# Altium PCB 底板20160428.PcbDoc (part 3 of 5)
Units mm, origin at the board's own origin, x right, y up, seen from the top; angles counter-clockwise.
Board outline 123.72 x 102.71 mm, 2 copper layers (Top Layer, Bottom Layer); 224 components, 227 nets, 768 pads, 282 vias.
Unrouted connection lines stored in the file: 2.
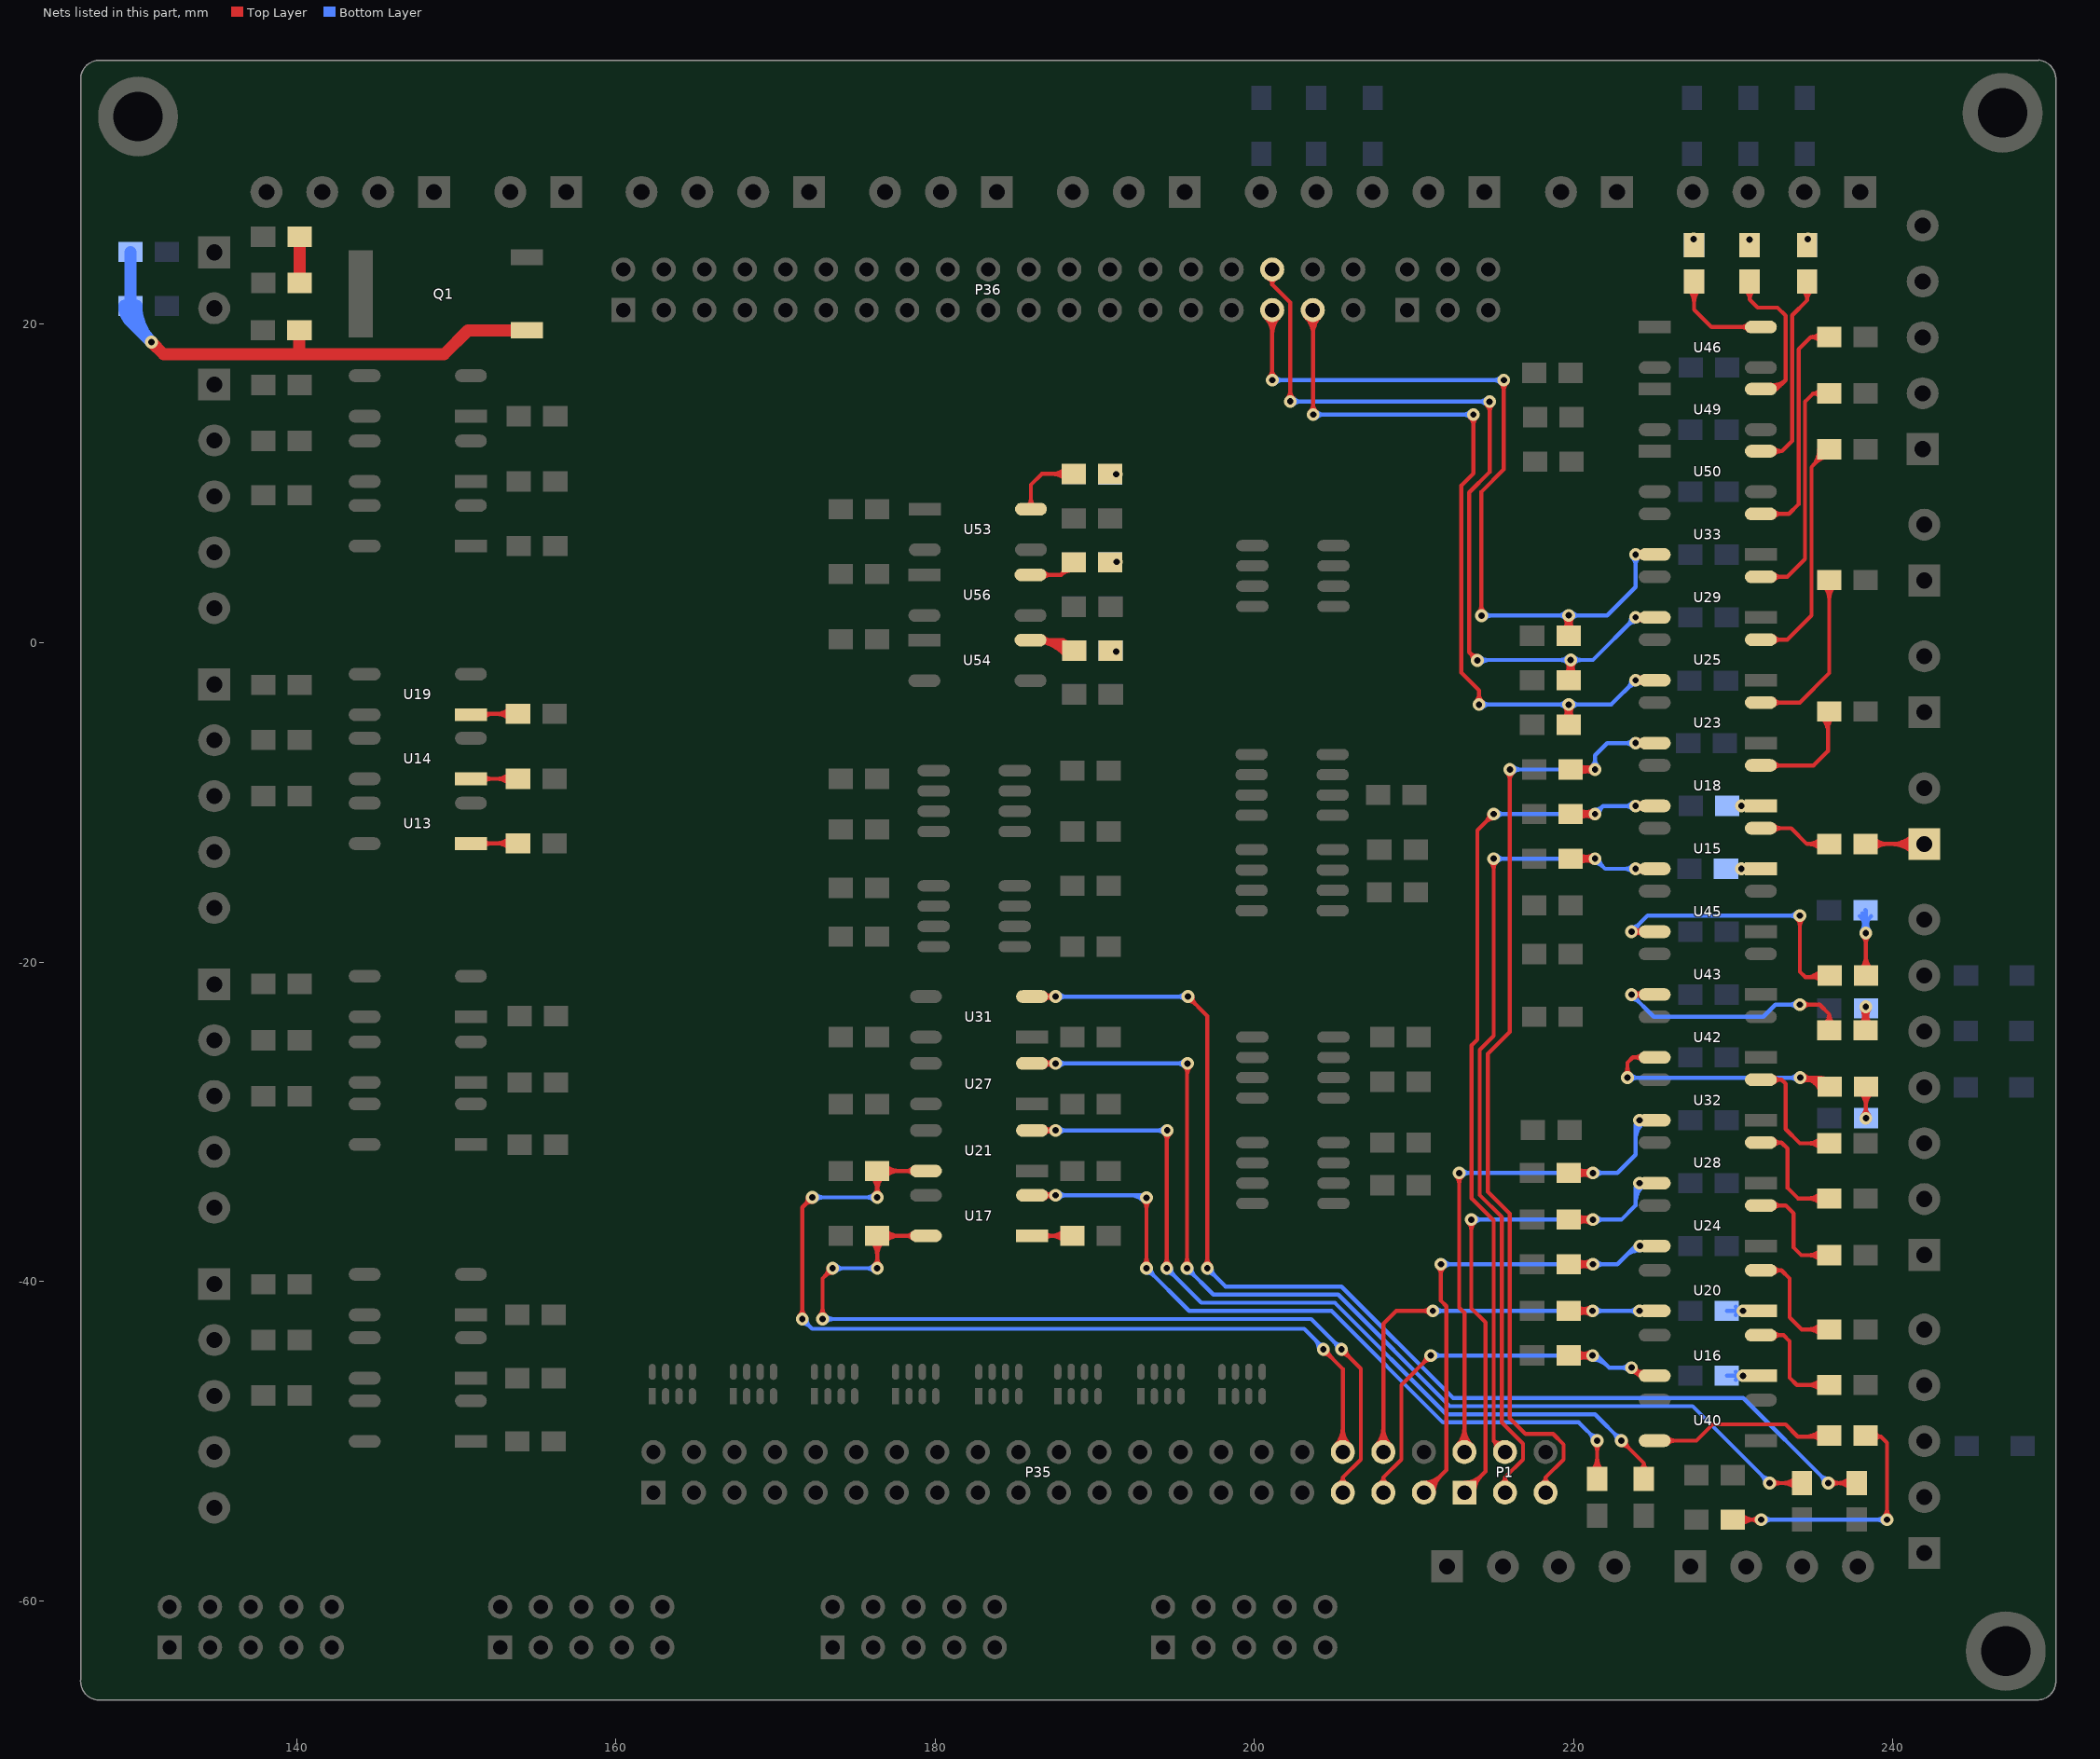
[diagram p3: the nets of this part, all layers, seen from the top]

## Via types
v1: diameter 0.8, hole 0.4, Top Layer to Bottom Layer, 282 vias

## Nets (pads, with @x,y where several pads share a name; then routed paths per layer and width w, separated by ;. In a path a pad name is that pad's centre, name@x,y a point inside that pad or via, vN(x,y) a via of type N, cw(c..) or ccw(c..) an arc to the next point about the centre after c; other vN are vias at no path point) (continued)
INPUT_27_B: P35.35 R51.1 U17.6 | length 68.7
  Top Layer w0.254: v1@172.756,-42.149 ccw(c172.29,-41.683) 172.949,-41.683 ccw(c173.608,-41.683) v1@173.142,-42.149 ; v1(172.949,-42.342) 172.949,-39.802 v1(173.584,-39.167) ; v1@173.311,-39.167 cw(c172.652,-39.167) 173.118,-39.633 cw(c173.584,-40.099) v1@173.584,-39.44 ; R51.1@176.018,-37.494 cw(c175.151,-38.361) 176.378,-38.361 cw(c177.604,-38.361) R51.1@176.737,-37.494 ; v1@176.185,-38.974 ccw(c175.719,-38.508) 176.378,-38.508 ccw(c177.037,-38.508) v1@176.571,-38.974 ; v1(176.378,-39.167) R51.1@176.378,-37.135 U17.6@179.426,-37.134 U17.6@179.426,-37.134 ; R51.1@176.864,-37.494 cw(c177.731,-38.361) 177.731,-37.135 cw(c177.731,-35.908) R51.1@176.864,-36.776 ; 178.164,-37.135 ccw(c178.164,-36.472) U17.6@178.633,-36.941 ; 178.169,-37.135 cw(c178.169,-37.79) U17.6@178.633,-37.327 ; P35.35@205.294,-52.639 ccw(c205.138,-52.273) 205.537,-52.273 ; v1@205.461,-44.52 cw(c205.461,-45.179) 205.927,-44.713 cw(c206.393,-44.247) v1@205.734,-44.247 ; v1(205.461,-44.247) 206.668,-45.454 206.668,-51.141 205.537,-52.272 ; P35.35@205.537,-53.213 205.537,-52.272 ; P35.35@205.78,-52.639 cw(c205.935,-52.273) 205.537,-52.273
  Bottom Layer w0.254: v1(172.949,-42.342) 203.556,-42.342 v1(205.461,-44.247) ; v1@173.142,-42.535 cw(c173.608,-43.001) 173.608,-42.342 cw(c173.608,-41.683) v1@173.142,-42.149 ; v1(173.584,-39.167) v1(176.378,-39.167) ; v1@173.777,-39.36 cw(c174.243,-39.826) 174.243,-39.167 cw(c174.243,-38.508) v1@173.777,-38.974 ; v1@176.185,-39.36 ccw(c175.719,-39.826) 175.719,-39.167 ccw(c175.719,-38.508) v1@176.185,-38.974 ; v1@205.188,-44.247 ccw(c204.529,-44.247) 204.995,-43.781 ccw(c205.461,-43.315) v1@205.461,-43.974
INPUT_28_B: P35.36 R59.1 U21.6 | length 74
  Top Layer w0.254: v1@171.486,-42.149 ccw(c171.02,-41.683) 171.679,-41.683 ccw(c172.338,-41.683) v1@171.872,-42.149 ; v1(171.679,-42.342) 171.679,-35.357 v1(172.314,-34.722) ; v1@172.041,-34.722 cw(c171.382,-34.722) 171.848,-35.188 cw(c172.314,-35.654) v1@172.314,-34.995 ; R59.1@176.018,-33.43 cw(c175.151,-34.297) 176.378,-34.297 cw(c177.604,-34.297) R59.1@176.737,-33.43 ; v1@176.185,-34.529 ccw(c175.719,-34.063) 176.378,-34.063 ccw(c177.037,-34.063) v1@176.571,-34.529 ; v1(176.378,-34.722) R59.1@176.378,-33.071 U21.6@179.426,-33.07 U21.6@179.426,-33.07 ; R59.1@176.864,-33.43 cw(c177.731,-34.297) 177.731,-33.071 cw(c177.731,-31.844) R59.1@176.864,-32.712 ; 178.164,-33.071 ccw(c178.164,-32.408) U21.6@178.633,-32.877 ; 178.169,-33.071 cw(c178.169,-33.726) U21.6@178.633,-33.263 ; v1@204.318,-44.52 cw(c204.318,-45.179) 204.784,-44.713 cw(c205.25,-44.247) v1@204.591,-44.247 ; v1(204.318,-44.247) 205.537,-45.466 P35.36@205.537,-50.673 ; P35.36@205.096,-50.232 ccw(c204.033,-49.169) 205.537,-49.169 ccw(c207.041,-49.169) P35.36@205.977,-50.232 ; P35.36@205.276,-50.412 ccw(c204.646,-49.782) 205.537,-49.782 ccw(c206.428,-49.782) P35.36@205.798,-50.412
  Bottom Layer w0.254: v1@171.679,-42.615 cw(c171.679,-43.274) 172.145,-42.808 cw(c172.611,-42.342) v1@171.952,-42.342 ; v1(171.679,-42.342) 172.295,-42.958 203.117,-42.958 204.318,-44.158 v1(204.318,-44.247) ; v1(172.314,-34.722) v1(176.378,-34.722) ; v1@172.507,-34.915 cw(c172.973,-35.381) 172.973,-34.722 cw(c172.973,-34.063) v1@172.507,-34.529 ; v1@176.185,-34.915 ccw(c175.719,-35.381) 175.719,-34.722 ccw(c175.719,-34.063) v1@176.185,-34.529 ; 203.789,-43.63 cw(c203.172,-44.247) v1@204.045,-44.247 ; 204.003,-43.843 ccw(c204.318,-43.528) v1@204.318,-43.974
INPUT_29_B: P35.37 R50.1 U16.6 | length 41.6
  Top Layer w0.254: P35.37@207.834,-52.639 ccw(c207.678,-52.273) 208.077,-52.273 ; P35.37@208.077,-53.213 208.077,-52.272 ; P35.37@208.32,-52.639 cw(c208.475,-52.273) 208.077,-52.273 ; v1@210.776,-44.628 cw(c210.117,-44.628) 210.583,-45.094 cw(c211.049,-45.56) v1@211.049,-44.901 ; v1(211.049,-44.628) 209.208,-46.469 209.208,-51.141 208.077,-52.272 ; R50.1@219.685,-44.628 v1(221.183,-44.628) ; R50.1@220.171,-44.987 cw(c221.038,-45.854) 221.038,-44.628 cw(c221.038,-43.401) R50.1@220.171,-44.269 ; 220.488,-44.775 cw(c220.667,-45.445) v1@221.038,-44.859 ; 220.488,-44.48 ccw(c220.667,-43.81) v1@221.038,-44.397 ; 220.624,-44.739 ccw(c220.487,-44.226) v1@220.947,-44.491 ; 220.624,-44.517 cw(c220.487,-45.03) v1@220.947,-44.764 ; v1@220.99,-44.821 ccw(c220.524,-45.287) 220.524,-44.628 ccw(c220.524,-43.969) v1@220.99,-44.435 ; v1@223.622,-45.663 cw(c223.622,-46.322) 224.088,-45.856 cw(c224.554,-45.39) v1@223.895,-45.39 ; v1@223.766,-45.621 cw(c223.894,-45.827) 224.016,-45.617 cw(c224.137,-45.407) v1@223.894,-45.399 ; v1@223.887,-45.455 ccw(c224.154,-45.52) 224.016,-45.759 ; v1@223.892,-45.349 ccw(c224.658,-45.234) U16.6@224.271,-45.906 ; 223.955,-45.724 ccw(c224.357,-45.322) U16.6@224.47,-45.878 ; U16.6@224.419,-45.629 cw(c224.243,-44.768) v1(223.622,-45.39) 224.129,-45.897 U16.6@225.146,-45.897
  Bottom Layer w0.254: v1(211.049,-44.628) 221.463,-44.628 222.225,-45.39 v1(223.622,-45.39) ; v1@211.242,-44.821 cw(c211.708,-45.287) 211.708,-44.628 cw(c211.708,-43.969) v1@211.242,-44.435 ; v1@220.99,-44.821 ccw(c220.524,-45.287) 220.524,-44.628 ccw(c220.524,-43.969) v1@220.99,-44.435 ; v1@221.183,-44.901 cw(c221.183,-46.234) 222.126,-45.291 ; v1@221.183,-44.647 cw(c221.183,-45.367) 221.693,-44.858 ; v1@223.429,-45.583 ccw(c222.963,-46.049) 222.963,-45.39 ccw(c222.963,-44.731) v1@223.429,-45.197
INPUT_30_B: P35.38 R58.1 U20.6 | length 42.7
  Top Layer w0.254: P35.38@207.636,-50.232 ccw(c206.573,-49.169) 208.077,-49.169 ccw(c209.581,-49.169) P35.38@208.517,-50.232 ; P35.38@207.816,-50.412 ccw(c207.186,-49.782) 208.077,-49.782 ccw(c208.968,-49.782) P35.38@208.338,-50.412 ; P35.38@208.077,-50.673 208.077,-42.647 208.89,-41.834 v1(211.176,-41.834) ; v1@210.983,-42.027 ccw(c210.517,-42.493) 210.517,-41.834 ccw(c210.517,-41.175) v1@210.983,-41.641 ; R58.1@219.685,-41.834 R58.1@219.685,-41.834 v1(221.183,-41.834) ; R58.1@220.171,-42.193 cw(c221.038,-43.06) 221.038,-41.834 cw(c221.038,-40.607) R58.1@220.171,-41.475 ; 220.488,-41.981 cw(c220.667,-42.651) v1@221.038,-42.065 ; 220.488,-41.686 ccw(c220.667,-41.016) v1@221.038,-41.603 ; 220.624,-41.945 ccw(c220.487,-41.432) v1@220.947,-41.697 ; 220.624,-41.723 cw(c220.487,-42.236) v1@220.947,-41.97 ; v1@220.99,-42.027 ccw(c220.524,-42.493) 220.524,-41.834 ccw(c220.524,-41.175) v1@220.99,-41.641 ; U20.6@224.269,-42.012 ccw(c223.876,-42.355) v1@223.876,-41.834 ; U20.6@224.268,-41.654 cw(c223.876,-41.316) v1@223.876,-41.834 ; U20.6@224.323,-42.027 cw(c224.791,-42.495) U20.6@224.791,-41.833 ; U20.6@224.323,-41.641 ccw(c224.786,-41.177) U20.6@224.786,-41.833 ; U20.6@225.146,-41.833 v1(224.13,-41.834) v1(224.13,-41.834) v1@223.876,-41.834
  Bottom Layer w0.254: v1(211.176,-41.834) 223.876,-41.834 v1@223.877,-41.833 ; v1@211.369,-42.027 cw(c211.835,-42.493) 211.835,-41.834 cw(c211.835,-41.175) v1@211.369,-41.641 ; v1@220.99,-42.027 ccw(c220.524,-42.493) 220.524,-41.834 ccw(c220.524,-41.175) v1@220.99,-41.641 ; v1@221.376,-42.027 cw(c221.842,-42.493) 221.842,-41.834 cw(c221.842,-41.175) v1@221.376,-41.641 ; v1@223.937,-42.027 ccw(c223.471,-42.493) 223.471,-41.834 ccw(c223.471,-41.175) v1@223.937,-41.641
INPUT_31_B: P35.39 R66.1 U24.6 | length 46.9
  Top Layer w0.254: P35.39@210.617,-53.213 212.026,-51.804 212.026,-41.541 211.684,-41.199 v1(211.684,-38.913) ; P35.39@210.617,-52.844 ccw(c210.617,-51.953) 211.247,-52.583 ccw(c211.877,-53.213) P35.39@210.986,-53.213 ; P35.39@210.617,-52.59 ccw(c210.617,-51.086) 211.68,-52.149 ccw(c212.744,-53.213) P35.39@211.24,-53.213 ; v1@211.491,-39.106 cw(c211.025,-39.572) 211.684,-39.572 cw(c212.343,-39.572) v1@211.877,-39.106 ; R66.1@219.685,-38.913 v1(221.209,-38.913) ; R66.1@220.171,-39.272 cw(c221.038,-40.139) 221.038,-38.913 cw(c221.038,-37.686) R66.1@220.171,-38.554 ; 220.499,-39.057 cw(c220.682,-39.743) v1@221.062,-39.143 ; 220.499,-38.768 ccw(c220.682,-38.083) v1@221.062,-38.682 ; 220.664,-39.013 ccw(c220.532,-38.522) v1@220.972,-38.776 ; 220.664,-38.812 cw(c220.532,-39.303) v1@220.972,-39.049 ; v1@221.016,-39.106 ccw(c220.55,-39.572) 220.55,-38.913 ccw(c220.55,-38.254) v1@221.016,-38.72 ; v1@223.876,-37.77 v1@223.877,-37.769 ; U24.6@224.268,-37.947 ccw(c223.877,-38.286) v1@223.877,-37.769 ; U24.6@224.268,-37.59 cw(c223.877,-37.251) v1@223.877,-37.769 ; U24.6@224.348,-37.963 cw(c224.817,-38.431) U24.6@224.817,-37.769 ; U24.6@224.348,-37.577 ccw(c224.812,-37.113) U24.6@224.812,-37.769 ; U24.6@225.146,-37.769 v1@223.877,-37.769
  Bottom Layer w0.254: v1(211.684,-38.913) v1(221.209,-38.913) 222.733,-38.913 v1@223.876,-37.77 ; v1@211.877,-39.106 cw(c212.343,-39.572) 212.343,-38.913 cw(c212.343,-38.254) v1@211.877,-38.72 ; v1@221.016,-39.106 ccw(c220.55,-39.572) 220.55,-38.913 ccw(c220.55,-38.254) v1@221.016,-38.72 ; v1@221.402,-39.106 cw(c221.868,-39.572) 221.868,-38.913 cw(c221.868,-38.254) v1@221.402,-38.72 ; 223.212,-38.433 cw(c224.155,-39.376) v1@224.155,-38.043 ; 223.646,-38 cw(c224.155,-38.509) v1@224.155,-37.789
  other v1: 224.155,-37.77
INPUT_32_B: P1.1 R74.1 U28.6 | length 49.6
  Top Layer w0.254: P1.1@213.157,-53.213 214.478,-51.892 214.478,-42.556 213.589,-41.667 v1(213.589,-36.119) ; P1.1@213.157,-52.844 ccw(c213.157,-51.953) 213.787,-52.583 ccw(c214.417,-53.213) P1.1@213.526,-53.213 ; P1.1@213.157,-52.59 ccw(c213.157,-51.086) 214.22,-52.149 ccw(c215.284,-53.213) P1.1@213.78,-53.213 ; v1@213.396,-36.312 cw(c212.93,-36.778) 213.589,-36.778 cw(c214.248,-36.778) v1@213.782,-36.312 ; R74.1@219.685,-36.119 v1(221.209,-36.119) ; R74.1@220.171,-36.478 cw(c221.038,-37.345) 221.038,-36.119 cw(c221.038,-34.892) R74.1@220.171,-35.76 ; 220.499,-36.263 cw(c220.682,-36.949) v1@221.062,-36.349 ; 220.499,-35.974 ccw(c220.682,-35.289) v1@221.062,-35.888 ; 220.664,-36.219 ccw(c220.532,-35.728) v1@220.972,-35.982 ; 220.664,-36.018 cw(c220.532,-36.509) v1@220.972,-36.255 ; v1@221.016,-36.312 ccw(c220.55,-36.778) 220.55,-36.119 ccw(c220.55,-35.46) v1@221.016,-35.926 ; v1@223.876,-33.833 v1@223.877,-33.832 ; U28.6@224.268,-34.01 ccw(c223.877,-34.349) v1@223.877,-33.832 ; U28.6@224.268,-33.653 cw(c223.877,-33.314) v1@223.877,-33.832 ; U28.6@224.323,-34.026 cw(c224.791,-34.494) U28.6@224.791,-33.832 ; U28.6@224.323,-33.64 ccw(c224.786,-33.176) U28.6@224.786,-33.832 ; U28.6@225.146,-33.832 v1@223.877,-33.832
  Bottom Layer w0.254: v1(213.589,-36.119) v1(221.209,-36.119) 222.987,-36.119 223.877,-35.229 223.877,-34.086 v1(224.13,-33.833) ; v1@213.782,-36.312 cw(c214.248,-36.778) 214.248,-36.119 cw(c214.248,-35.46) v1@213.782,-35.926 ; v1@221.016,-36.312 ccw(c220.55,-36.778) 220.55,-36.119 ccw(c220.55,-35.46) v1@221.016,-35.926 ; v1@221.402,-36.312 cw(c221.868,-36.778) 221.868,-36.119 cw(c221.868,-35.46) v1@221.402,-35.926 ; 223.877,-35.103 cw(c225.399,-35.103) v1@224.323,-34.026 ; 223.877,-34.489 cw(c224.786,-34.489) v1@224.143,-33.846
INPUT_33_B: P1.2 R82.1 U32.6 | length 50.9
  Top Layer w0.254: v1@212.634,-33.391 cw(c212.168,-33.857) 212.827,-33.857 cw(c213.486,-33.857) v1@213.02,-33.391 ; P1.2@212.716,-50.232 ccw(c211.653,-49.169) 213.157,-49.169 ccw(c214.661,-49.169) P1.2@213.597,-50.232 ; v1(212.827,-33.198) 212.827,-41.623 213.157,-41.954 P1.2@213.157,-50.673 ; P1.2@212.896,-50.412 ccw(c212.266,-49.782) 213.157,-49.782 ccw(c214.048,-49.782) P1.2@213.418,-50.412 ; R82.1@219.685,-33.198 v1(221.209,-33.198) ; R82.1@220.171,-33.557 cw(c221.038,-34.424) 221.038,-33.198 cw(c221.038,-31.971) R82.1@220.171,-32.839 ; 220.499,-33.342 cw(c220.682,-34.028) v1@221.062,-33.428 ; 220.499,-33.053 ccw(c220.682,-32.368) v1@221.062,-32.967 ; 220.664,-33.298 ccw(c220.532,-32.807) v1@220.972,-33.061 ; 220.664,-33.097 cw(c220.532,-33.588) v1@220.972,-33.334 ; v1@221.016,-33.391 ccw(c220.55,-33.857) 220.55,-33.198 ccw(c220.55,-32.539) v1@221.016,-33.005 ; v1@223.876,-29.896 v1@223.877,-29.895 ; U32.6@224.268,-30.073 ccw(c223.877,-30.412) v1@223.877,-29.895 ; U32.6@224.268,-29.716 cw(c223.877,-29.377) v1@223.877,-29.895 ; U32.6@224.323,-30.088 cw(c224.789,-30.554) 224.789,-29.895 cw(c224.789,-29.236) U32.6@224.323,-29.702 ; U32.6@225.146,-29.895 v1@223.877,-29.895
  Bottom Layer w0.254: v1(212.827,-33.198) v1(221.209,-33.198) 222.733,-33.198 223.876,-32.055 223.876,-30.149 v1(224.13,-29.895) ; v1@213.02,-33.391 cw(c213.486,-33.857) 213.486,-33.198 cw(c213.486,-32.539) v1@213.02,-33.005 ; v1@221.016,-33.391 ccw(c220.55,-33.857) 220.55,-33.198 ccw(c220.55,-32.539) v1@221.016,-33.005 ; v1@221.402,-33.391 cw(c221.868,-33.857) 221.868,-33.198 cw(c221.868,-32.539) v1@221.402,-33.005 ; 223.876,-31.167 cw(c225.402,-31.167) v1@224.323,-30.088 ; 223.876,-30.554 cw(c224.789,-30.554) v1@224.143,-29.908
INPUT_34_B: P1.3 R49.1 U15.6 | length 66.6
  Top Layer w0.254: v1@214.793,-13.706 cw(c214.327,-14.172) 214.986,-14.172 cw(c215.645,-14.172) v1@215.179,-13.706 ; v1(214.986,-13.513) 214.986,-24.613 214.116,-25.483 214.116,-34.581 215.494,-35.959 215.494,-48.819 216.828,-50.153 216.828,-51.141 215.697,-52.272 ; P1.3@215.454,-52.639 ccw(c215.298,-52.273) 215.697,-52.273 ; P1.3@215.697,-53.213 215.697,-52.272 ; P1.3@215.94,-52.639 cw(c216.095,-52.273) 215.697,-52.273 ; R49.1@219.812,-13.513 v1(221.336,-13.513) ; R49.1@220.298,-13.872 cw(c221.165,-14.739) 221.165,-13.513 cw(c221.165,-12.286) R49.1@220.298,-13.154 ; 220.626,-13.657 cw(c220.809,-14.343) v1@221.189,-13.743 ; 220.626,-13.368 ccw(c220.809,-12.683) v1@221.189,-13.282 ; 220.791,-13.613 ccw(c220.659,-13.122) v1@221.099,-13.376 ; 220.791,-13.412 cw(c220.659,-13.903) v1@221.099,-13.649 ; v1@221.143,-13.706 ccw(c220.677,-14.172) 220.677,-13.513 ccw(c220.677,-12.854) v1@221.143,-13.32 ; v1(223.876,-14.148) v1(223.876,-14.148) ; v1@224.069,-14.341 cw(c224.537,-14.809) U15.6@224.537,-14.147 ; v1@224.069,-13.955 ccw(c224.532,-13.491) U15.6@224.532,-14.147 ; U15.6@224.268,-14.325 ccw(c223.877,-14.664) v1(223.876,-14.148) ; U15.6@224.268,-13.968 cw(c223.877,-13.629) v1(223.876,-14.148) ; U15.6@225.146,-14.147 v1(223.876,-14.148)
  Bottom Layer w0.254: v1(214.986,-13.513) v1(221.336,-13.513) 221.971,-14.148 v1(223.876,-14.148) ; v1@215.179,-13.706 cw(c215.645,-14.172) 215.645,-13.513 cw(c215.645,-12.854) v1@215.179,-13.32 ; v1@221.143,-13.706 ccw(c220.677,-14.172) 220.677,-13.513 ccw(c220.677,-12.854) v1@221.143,-13.32 ; v1@221.336,-13.786 cw(c221.336,-14.445) 221.802,-13.979 cw(c222.268,-13.513) v1@221.609,-13.513 ; v1@223.683,-14.341 ccw(c223.217,-14.807) 223.217,-14.148 ccw(c223.217,-13.489) v1@223.683,-13.955
INPUT_35_B: P1.4 R57.1 U18.6 | length 66.4
  Top Layer w0.254: v1@214.713,-10.719 cw(c214.054,-10.719) 214.52,-11.185 cw(c214.986,-11.651) v1@214.986,-10.992 ; v1(214.986,-10.719) 213.97,-11.735 213.97,-24.841 213.608,-25.203 213.608,-34.792 214.986,-36.17 214.986,-49.962 ; P1.4@215.106,-50.475 ccw(c214.632,-50.316) 214.986,-49.962 ; P1.4@215.499,-50.082 cw(c215.339,-49.608) 214.986,-49.962 ; P1.4@215.697,-50.673 214.986,-49.962 ; R57.1@219.812,-10.719 v1(221.336,-10.719) ; R57.1@220.298,-11.078 cw(c221.165,-11.945) 221.165,-10.719 cw(c221.165,-9.492) R57.1@220.298,-10.36 ; 220.626,-10.863 cw(c220.809,-11.549) v1@221.189,-10.949 ; 220.626,-10.574 ccw(c220.809,-9.889) v1@221.189,-10.488 ; 220.791,-10.819 ccw(c220.659,-10.328) v1@221.099,-10.582 ; 220.791,-10.618 cw(c220.659,-11.109) v1@221.099,-10.855 ; v1@221.143,-10.912 ccw(c220.677,-11.378) 220.677,-10.719 ccw(c220.677,-10.06) v1@221.143,-10.526 ; v1(223.876,-10.211) v1(223.876,-10.211) ; v1@224.069,-10.404 cw(c224.537,-10.872) U18.6@224.537,-10.21 ; v1@224.069,-10.018 ccw(c224.532,-9.554) U18.6@224.532,-10.21 ; U18.6@224.268,-10.388 ccw(c223.877,-10.727) v1(223.876,-10.211) ; U18.6@224.268,-10.031 cw(c223.877,-9.692) v1(223.876,-10.211) ; U18.6@225.146,-10.21 v1(223.876,-10.211)
  Bottom Layer w0.254: v1(214.986,-10.719) v1(221.336,-10.719) 221.844,-10.211 v1(223.876,-10.211) ; v1@215.179,-10.912 cw(c215.645,-11.378) 215.645,-10.719 cw(c215.645,-10.06) v1@215.179,-10.526 ; v1@221.143,-10.912 ccw(c220.677,-11.378) 220.677,-10.719 ccw(c220.677,-10.06) v1@221.143,-10.526 ; v1@221.336,-10.446 ccw(c221.336,-9.787) 221.802,-10.253 ccw(c222.268,-10.719) v1@221.609,-10.719 ; v1@223.683,-10.404 ccw(c223.217,-10.87) 223.217,-10.211 ccw(c223.217,-9.552) v1@223.683,-10.018
INPUT_36_B: P1.5 R65.1 U23.6 | length 74.1
  Top Layer w0.254: v1@215.809,-8.118 cw(c215.343,-8.584) 216.002,-8.584 cw(c216.661,-8.584) v1@216.195,-8.118 ; v1(216.002,-7.925) 216.002,-24.359 214.624,-25.737 214.624,-34.371 216.002,-35.749 216.002,-48.565 216.979,-49.542 218.705,-49.542 219.368,-50.205 219.368,-51.141 218.237,-52.272 ; P1.5@217.994,-52.639 ccw(c217.838,-52.273) 218.237,-52.273 ; P1.5@218.237,-53.213 218.237,-52.272 ; P1.5@218.48,-52.639 cw(c218.635,-52.273) 218.237,-52.273 ; R65.1@219.812,-7.925 v1(221.336,-7.925) ; R65.1@220.298,-8.284 cw(c221.165,-9.151) 221.165,-7.925 cw(c221.165,-6.698) R65.1@220.298,-7.566 ; 220.626,-8.069 cw(c220.809,-8.755) v1@221.189,-8.155 ; 220.626,-7.78 ccw(c220.809,-7.095) v1@221.189,-7.694 ; 220.791,-8.025 ccw(c220.659,-7.534) v1@221.099,-7.788 ; 220.791,-7.824 cw(c220.659,-8.315) v1@221.099,-8.061 ; v1@221.143,-8.118 ccw(c220.677,-8.584) 220.677,-7.925 ccw(c220.677,-7.266) v1@221.143,-7.732 ; v1@224.07,-6.466 cw(c224.536,-6.932) 224.536,-6.273 cw(c224.536,-5.614) v1@224.07,-6.08 ; U23.6@224.268,-6.451 ccw(c223.877,-6.79) v1(223.877,-6.273) ; U23.6@224.268,-6.094 cw(c223.877,-5.755) v1(223.877,-6.273) ; U23.6@225.146,-6.273 v1(223.877,-6.273)
  Bottom Layer w0.254: v1(216.002,-7.925) v1(221.336,-7.925) 221.336,-7.036 222.099,-6.273 v1(223.877,-6.273) ; v1@216.195,-8.118 cw(c216.661,-8.584) 216.661,-7.925 cw(c216.661,-7.266) v1@216.195,-7.732 ; v1@221.143,-8.118 ccw(c220.677,-8.584) 220.677,-7.925 ccw(c220.677,-7.266) 221.143,-7.732 ccw(c220.677,-7.266) 221.336,-7.266 ccw(c221.995,-7.266) v1@221.529,-7.732 ; v1@223.684,-6.466 ccw(c223.218,-6.932) 223.218,-6.273 ccw(c223.218,-5.614) v1@223.684,-6.08
INPUT_37_B: P36.35 R67.1 U25.6 | length 68.4
  Top Layer w0.254: P36.35@203.217,20.413 cw(c202.092,19.288) 203.683,19.288 ; P36.35@203.396,20.592 cw(c202.705,19.901) 203.683,19.901 ; v1@203.49,14.493 ccw(c203.024,14.959) 203.683,14.959 ccw(c204.342,14.959) v1@203.876,14.493 ; v1(203.683,14.3) P36.35@203.683,20.828 ; 203.683,19.411 cw(c205.1,19.411) P36.35@204.098,20.413 ; 203.683,20.024 cw(c204.487,20.024) P36.35@203.918,20.592 ; v1@213.523,14.107 cw(c213.057,13.641) 213.716,13.641 cw(c214.375,13.641) v1@213.909,14.107 ; v1(213.716,14.3) 213.716,10.617 212.954,9.855 212.954,-1.854 214.071,-2.972 v1(214.071,-3.861) ; v1@213.878,-3.668 ccw(c213.412,-3.202) 214.071,-3.202 ccw(c214.73,-3.202) v1@214.264,-3.668 ; R67.1@219.325,-4.772 ccw(c218.458,-3.904) 219.685,-3.904 ccw(c220.911,-3.904) R67.1@220.044,-4.772 ; v1@219.453,-4.005 cw(c218.918,-4.336) R67.1@219.525,-4.499 ; v1@219.492,-4.054 cw(c219.026,-4.52) 219.685,-4.52 cw(c220.344,-4.52) v1@219.878,-4.054 ; 219.532,-4.474 cw(c220.131,-4.635) v1@219.821,-4.097 ; v1@219.548,-4.097 cw(c219.238,-4.635) 219.837,-4.474 ; R67.1@219.685,-5.131 v1(219.685,-3.861) ; R67.1@219.844,-4.499 cw(c220.452,-4.336) v1@219.917,-4.005 ; v1(223.877,-2.336) v1(223.877,-2.336) ; v1@224.07,-2.529 cw(c224.536,-2.995) 224.536,-2.336 cw(c224.536,-1.677) v1@224.07,-2.143 ; U25.6@224.268,-2.514 ccw(c223.877,-2.853) v1(223.877,-2.336) ; U25.6@224.268,-2.157 cw(c223.877,-1.818) v1(223.877,-2.336) ; U25.6@225.146,-2.336 v1(223.877,-2.336)
  Bottom Layer w0.254: v1(203.683,14.3) v1(213.716,14.3) ; v1@203.876,14.107 cw(c204.342,13.641) 204.342,14.3 cw(c204.342,14.959) v1@203.876,14.493 ; v1@213.523,14.107 ccw(c213.057,13.641) 213.057,14.3 ccw(c213.057,14.959) v1@213.523,14.493 ; v1(214.071,-3.861) v1(219.685,-3.861) 222.352,-3.861 v1(223.877,-2.336) ; v1@214.264,-4.054 cw(c214.73,-4.52) 214.73,-3.861 cw(c214.73,-3.202) v1@214.264,-3.668 ; v1@219.492,-4.054 ccw(c219.026,-4.52) 219.026,-3.861 ccw(c219.026,-3.202) v1@219.492,-3.668 ; v1@219.878,-4.054 cw(c220.344,-4.52) 220.344,-3.861 cw(c220.344,-3.202) v1@219.878,-3.668 ; v1@223.604,-2.336 cw(c222.945,-2.336) 223.411,-2.802 cw(c223.877,-3.268) v1@223.877,-2.609
INPUT_38_B: P36.34 R75.1 U29.6 | length 68.9
  Top Layer w0.254: P36.34@200.874,22.82 cw(c200.719,22.453) 201.117,22.453 ; P36.34@201.117,23.393 201.117,22.453 ; P36.34@201.36,22.82 ccw(c201.516,22.453) 201.117,22.453 ; v1@202.055,15.318 ccw(c201.589,15.784) 202.248,15.784 ccw(c202.907,15.784) v1@202.441,15.318 ; v1(202.248,15.125) 202.248,21.322 201.117,22.453 ; v1@213.697,-1.092 ccw(c213.038,-1.092) 213.504,-0.626 ccw(c213.97,-0.16) v1@213.97,-0.819 ; v1(213.97,-1.092) 213.462,-0.584 213.462,9.431 214.732,10.701 v1(214.732,15.113) ; v1@214.539,14.92 cw(c214.073,14.454) 214.732,14.454 cw(c215.391,14.454) v1@214.925,14.92 ; R75.1@219.452,-1.978 ccw(c218.585,-1.11) 219.812,-1.11 ccw(c221.038,-1.11) R75.1@220.171,-1.978 ; v1@219.58,-1.211 cw(c219.045,-1.542) R75.1@219.652,-1.705 ; v1@219.619,-1.26 cw(c219.153,-1.726) 219.812,-1.726 cw(c220.471,-1.726) v1@220.005,-1.26 ; 219.659,-1.68 cw(c220.258,-1.841) v1@219.948,-1.303 ; v1@219.675,-1.303 cw(c219.365,-1.841) 219.964,-1.68 ; R75.1@219.685,-2.337 219.812,-2.21 v1(219.812,-1.067) ; R75.1@219.971,-1.705 cw(c220.579,-1.542) v1@220.044,-1.211 ; v1@224.07,1.408 cw(c224.536,0.942) 224.536,1.601 cw(c224.536,2.26) v1@224.07,1.794 ; U29.6@224.268,1.423 ccw(c223.877,1.084) v1(223.877,1.601) ; U29.6@224.268,1.78 cw(c223.877,2.119) v1(223.877,1.601) ; U29.6@225.146,1.601 v1(223.877,1.601)
  Bottom Layer w0.254: v1@202.248,15.113 v1(214.732,15.113) ; v1@202.441,14.932 cw(c202.878,14.495) 202.878,15.113 ; v1@202.441,15.318 ccw(c202.936,15.813) 202.936,15.113 ; v1@213.97,-1.067 v1(219.812,-1.067) 221.209,-1.067 v1(223.877,1.601) ; v1@214.163,-1.285 cw(c214.69,-1.813) 214.69,-1.067 ; v1@214.163,-0.899 ccw(c214.567,-0.494) 214.567,-1.067 ; v1@214.539,14.92 ccw(c214.073,14.454) 214.073,15.113 ccw(c214.073,15.772) v1@214.539,15.306 ; v1@219.619,-1.26 ccw(c219.153,-1.726) 219.153,-1.067 ccw(c219.153,-0.408) v1@219.619,-0.874 ; v1@220.005,-1.26 cw(c220.471,-1.726) 220.471,-1.067 cw(c220.471,-0.408) v1@220.005,-0.874 ; v1@223.604,1.601 cw(c222.945,1.601) 223.411,1.135 cw(c223.877,0.669) v1@223.877,1.328
INPUT_39_B: P36.33 R83.1 U33.6 | length 69.2
  Top Layer w0.254: P36.33@200.677,20.413 cw(c199.613,19.349) 201.117,19.349 cw(c202.621,19.349) P36.33@201.558,20.413 ; P36.33@200.856,20.592 cw(c200.226,19.963) 201.117,19.963 cw(c202.008,19.963) P36.33@201.378,20.592 ; v1@200.924,16.652 ccw(c200.458,17.118) 201.117,17.118 ccw(c201.776,17.118) v1@201.31,16.652 ; v1(201.117,16.459) P36.33@201.117,20.853 ; v1@214.031,1.895 ccw(c213.565,2.361) 214.224,2.361 ccw(c214.883,2.361) v1@214.417,1.895 ; v1(214.224,1.702) 214.224,9.474 215.621,10.871 v1(215.621,16.459) ; v1@215.428,16.266 cw(c214.962,15.8) 215.621,15.8 cw(c216.28,15.8) v1@215.814,16.266 ; R83.1@219.325,0.816 ccw(c218.458,1.684) 219.685,1.684 ccw(c220.911,1.684) R83.1@220.044,0.816 ; v1@219.453,1.583 cw(c218.918,1.252) R83.1@219.525,1.089 ; v1@219.492,1.534 cw(c219.026,1.068) 219.685,1.068 cw(c220.344,1.068) v1@219.878,1.534 ; 219.532,1.114 cw(c220.131,0.953) v1@219.821,1.491 ; v1@219.548,1.491 cw(c219.238,0.953) 219.837,1.114 ; R83.1@219.685,0.457 v1(219.685,1.727) ; R83.1@219.844,1.089 cw(c220.452,1.252) v1@219.917,1.583 ; v1(223.876,5.537) v1(223.876,5.537) ; v1@224.069,5.344 cw(c224.537,4.876) U33.6@224.537,5.538 ; v1@224.069,5.73 ccw(c224.532,6.194) U33.6@224.532,5.538 ; U33.6@224.268,5.36 ccw(c223.877,5.021) v1(223.876,5.537) ; U33.6@224.268,5.717 cw(c223.877,6.056) v1(223.876,5.537) ; U33.6@225.146,5.538 v1(223.876,5.537)
  Bottom Layer w0.254: v1(201.117,16.459) v1(215.621,16.459) ; v1@201.31,16.266 cw(c201.776,15.8) 201.776,16.459 cw(c201.776,17.118) v1@201.31,16.652 ; v1@214.224,1.727 v1(219.685,1.727) 222.098,1.727 223.876,3.505 v1(223.876,5.537) ; v1@214.417,1.509 cw(c214.944,0.981) 214.944,1.727 ; v1@214.417,1.895 ccw(c214.821,2.3) 214.821,1.727 ; v1@215.428,16.266 ccw(c214.962,15.8) 214.962,16.459 ccw(c214.962,17.118) v1@215.428,16.652 ; v1@219.492,1.534 ccw(c219.026,1.068) 219.026,1.727 ccw(c219.026,2.386) v1@219.492,1.92 ; v1@219.878,1.534 cw(c220.344,1.068) 220.344,1.727 cw(c220.344,2.386) v1@219.878,1.92 ; v1@223.683,5.344 cw(c223.217,4.878) 223.876,4.878 cw(c224.535,4.878) v1@224.069,5.344
JT_KR1: D14.2 P47.1 | length 11.3
  Top Layer w0.254: D14.2@238.302,-12.598 D14.2@238.295,-12.592 P47.1@241.954,-12.592 ; D14.2@238.781,-12.951 cw(c239.648,-13.818) 239.648,-12.592 cw(c239.648,-11.365) D14.2@238.781,-12.232 ; 239.836,-12.592 cw(c239.836,-14.722) P47.1@241.343,-13.216 ; 239.869,-12.592 ccw(c239.869,-10.507) P47.1@241.343,-11.981 ; 240.45,-12.592 cw(c240.45,-14.109) P47.1@241.523,-13.036 ; 240.482,-12.592 ccw(c240.482,-11.12) P47.1@241.523,-12.161
NetC1_2: C1.2 Q1.1 R1.1 R2.1 | length 35.6
  Top Layer w0.762: v1@130.937,18.821 131.674,18.085 149.25,18.085 150.749,19.583 Q1.1@154.432,19.583 ; 140.183,18.11 C1.2@140.183,19.583
  Bottom Layer w0.762: R2.1@129.21,21.107 ccw(c130.559,21.107) 129.605,20.153 ; R1.1@129.591,24.486 R2.1@129.591,21.107 129.591,20.168 v1(130.912,18.847) ; R2.1@129.972,21.107 ccw(c133.16,21.107) v1@130.906,18.853
NetD14_1: D14.1 U15.3 | length 7.7
  Top Layer w0.254: U15.3@231.724,-11.607 233.628,-11.607 234.613,-12.592 D14.1@236.009,-12.592 ; U15.3@232.517,-11.8 cw(c232.983,-12.266) 232.983,-11.607 cw(c232.983,-10.948) U15.3@232.517,-11.414 ; D14.1@235.523,-12.951 ccw(c234.656,-13.818) 234.656,-12.592 ccw(c234.656,-11.365) D14.1@235.523,-12.232
NetD15_1: D15.1 U16.3 | length 9.8
  Top Layer w0.254: U16.3@231.796,-43.357 233.146,-43.357 233.528,-43.739 233.528,-46.025 233.978,-46.475 D15.1@236.009,-46.475 ; U16.3@232.517,-43.55 cw(c232.983,-44.016) 232.983,-43.357 cw(c232.983,-42.698) U16.3@232.517,-43.164 ; D15.1@235.523,-46.834 ccw(c234.656,-47.702) 234.656,-46.475 ccw(c234.656,-45.249) D15.1@235.523,-46.116
NetD16_1: D16.1 U17.3 | length 59.5
  Top Layer w0.254: U17.3@186.076,-34.594 186.077,-34.595 v1(187.554,-34.595) ; U17.3@186.869,-34.787 cw(c187.332,-35.25) v1@187.332,-34.595 ; U17.3@186.869,-34.401 ccw(c187.337,-33.932) v1@187.337,-34.595 ; v1@187.304,-34.706 ccw(c187.019,-34.833) 187.1,-34.531 ccw(c187.153,-34.332) v1@187.325,-34.445 ; v1@187.305,-34.483 cw(c187.019,-34.355) 187.1,-34.657 cw(c187.153,-34.854) v1@187.324,-34.743 ; v1@187.361,-34.788 ccw(c186.895,-35.254) 186.895,-34.595 ccw(c186.895,-33.936) v1@187.361,-34.402 ; v1@193.05,-38.974 ccw(c192.584,-38.508) 193.243,-38.508 ccw(c193.902,-38.508) v1@193.436,-38.974 ; v1@193.05,-34.94 cw(c192.584,-35.406) 193.243,-35.406 cw(c193.902,-35.406) v1@193.436,-34.94 ; v1(193.243,-39.167) v1(193.243,-34.747) ; D16.1@221.11,-51.881 ccw(c220.243,-51.014) 221.469,-51.014 ccw(c222.696,-51.013) D16.1@221.829,-51.881 ; v1@221.276,-50.162 cw(c220.81,-50.628) 221.469,-50.628 cw(c222.128,-50.628) v1@221.662,-50.162 ; D16.1@221.469,-52.367 v1(221.469,-49.969)
  Bottom Layer w0.254: v1(187.554,-34.595) v1@193.396,-34.595 ; v1@187.747,-34.788 cw(c188.213,-35.254) 188.213,-34.595 cw(c188.213,-33.936) v1@187.747,-34.402 ; 192.216,-34.595 cw(c192.216,-35.774) v1@193.05,-34.94 ; 192.829,-34.595 cw(c192.829,-35.161) v1@193.23,-34.761 ; v1@193.243,-39.44 cw(c193.243,-40.099) 193.709,-39.633 cw(c194.175,-39.167) v1@193.516,-39.167 ; v1(193.243,-39.167) 195.91,-41.834 204.829,-41.834 211.814,-48.819 220.32,-48.819 v1(221.469,-49.969) ; v1@221.196,-49.969 ccw(c220.537,-49.969) 221.003,-49.503 ccw(c221.469,-49.036) v1@221.469,-49.696
NetD18_1: D18.1 U18.3 | length 10.5
  Top Layer w0.254: U18.3@231.796,-7.67 235.027,-7.67 235.933,-6.764 D18.1@235.933,-4.362 ; U18.3@232.517,-7.863 cw(c232.983,-8.329) 232.983,-7.67 cw(c232.983,-7.011) U18.3@232.517,-7.477 ; D18.1@235.523,-4.645 cw(c234.533,-5.635) 235.933,-5.635 ; D18.1@235.702,-4.465 cw(c235.146,-5.022) 235.933,-5.022 ; 235.933,-5.39 cw(c236.986,-5.39) D18.1@236.241,-4.645
NetD19_1: D19.1 U20.3 | length 10.1
  Top Layer w0.254: U20.3@231.796,-39.293 233.019,-39.293 233.528,-39.802 233.528,-42.24 234.283,-42.995 D19.1@236.009,-42.995 ; U20.3@232.517,-39.486 cw(c232.983,-39.952) 232.983,-39.293 cw(c232.983,-38.634) U20.3@232.517,-39.1 ; D19.1@235.523,-43.355 ccw(c234.656,-44.222) 234.656,-42.995 ccw(c234.656,-41.769) D19.1@235.523,-42.636
NetD20_1: D20.1 U21.3 | length 64.4
  Top Layer w0.254: U21.3@186.077,-30.531 v1(187.554,-30.531) ; U21.3@186.869,-30.723 cw(c187.332,-31.186) v1@187.332,-30.531 ; U21.3@186.869,-30.337 ccw(c187.337,-29.868) v1@187.337,-30.531 ; v1@187.304,-30.642 ccw(c187.019,-30.769) 187.1,-30.467 ccw(c187.153,-30.268) v1@187.325,-30.381 ; v1@187.305,-30.419 cw(c187.019,-30.291) 187.1,-30.593 cw(c187.153,-30.79) v1@187.324,-30.679 ; v1@187.361,-30.724 ccw(c186.895,-31.19) 186.895,-30.531 ccw(c186.895,-29.872) v1@187.361,-30.338 ; v1@194.32,-38.974 ccw(c193.854,-38.508) 194.513,-38.508 ccw(c195.172,-38.508) v1@194.706,-38.974 ; v1@194.346,-30.724 cw(c193.941,-31.129) 194.513,-31.129 ; v1(194.513,-39.167) v1@194.513,-30.556 ; 194.513,-31.251 cw(c195.259,-31.251) v1@194.732,-30.724 ; v1@222.987,-50.235 cw(c222.987,-50.894) 223.453,-50.428 cw(c223.919,-49.962) v1@223.26,-49.962 ; v1(222.987,-49.962) 224.39,-51.366 ; D20.1@224.139,-51.799 ccw(c223.892,-51.366) 224.39,-51.366 ; D20.1@224.39,-52.367 224.39,-51.366 ; D20.1@224.642,-51.799 cw(c224.889,-51.366) 224.39,-51.366
  Bottom Layer w0.254: v1(187.554,-30.531) v1(194.539,-30.531) ; v1@187.747,-30.724 cw(c188.213,-31.19) 188.213,-30.531 cw(c188.213,-29.872) v1@187.747,-30.338 ; v1@194.346,-30.724 ccw(c193.88,-31.19) 193.88,-30.531 ccw(c193.88,-29.872) v1@194.346,-30.338 ; v1@194.513,-39.44 cw(c194.513,-40.099) 194.979,-39.633 cw(c195.445,-39.167) v1@194.786,-39.167 ; v1(194.513,-39.167) 196.672,-41.326 205.04,-41.326 212.025,-48.311 221.336,-48.311 v1(222.987,-49.962) ; v1@222.714,-49.962 ccw(c222.055,-49.962) 222.521,-49.496 ccw(c222.987,-49.03) v1@222.987,-49.689
NetD22_1: D22.1 U23.3 | length 13.8
  Top Layer w0.254: U23.3@231.724,-3.733 234.164,-3.733 236.009,-1.887 D22.1@236.009,3.944 ; U23.3@232.517,-3.926 cw(c232.983,-4.392) 232.983,-3.733 cw(c232.983,-3.074) U23.3@232.517,-3.54 ; D22.1@235.65,3.585 cw(c234.783,2.717) 236.009,2.717 cw(c237.235,2.717) D22.1@236.368,3.585
NetD23_1: D23.1 U24.3 | length 9.7
  Top Layer w0.254: U24.3@231.796,-35.229 233.273,-35.229 233.782,-35.738 233.782,-37.871 234.257,-38.347 D23.1@236.009,-38.347 ; U24.3@232.517,-35.422 cw(c232.983,-35.888) 232.983,-35.229 cw(c232.983,-34.57) U24.3@232.517,-35.036 ; D23.1@235.523,-38.706 ccw(c234.656,-39.574) 234.656,-38.347 ccw(c234.656,-37.121) D23.1@235.523,-37.988
NetD24_1: D24.1 U25.3 | length 18.3
  Top Layer w0.254: U25.3@231.724,0.204 233.376,0.204 234.899,1.727 234.899,11.013 D24.1@236.009,12.123 ; U25.3@232.517,0.011 cw(c232.983,-0.455) 232.983,0.204 cw(c232.983,0.863) U25.3@232.517,0.397 ; 234.925,11.039 ccw(c233.841,12.123) D24.1@235.374,12.123 ; 235.232,11.345 cw(c235.882,10.695) D24.1@235.882,11.615 ; 235.359,11.472 ccw(c234.708,12.123) D24.1@235.628,12.123
NetD26_1: D26.1 U27.3 | length 78.7
  Top Layer w0.254: U27.3@186.077,-26.34 v1(187.554,-26.34) ; U27.3@186.869,-26.532 cw(c187.332,-26.995) v1@187.332,-26.34 ; U27.3@186.869,-26.146 ccw(c187.337,-25.677) v1@187.337,-26.34 ; v1@187.304,-26.451 ccw(c187.019,-26.578) 187.1,-26.276 ccw(c187.153,-26.077) v1@187.325,-26.19 ; v1@187.305,-26.228 cw(c187.019,-26.1) 187.1,-26.402 cw(c187.153,-26.599) v1@187.324,-26.488 ; v1@187.361,-26.533 ccw(c186.895,-26.999) 186.895,-26.34 ccw(c186.895,-25.681) v1@187.361,-26.147 ; v1@195.59,-38.974 ccw(c195.124,-38.508) 195.783,-38.508 ccw(c196.442,-38.508) v1@195.976,-38.974 ; v1@195.616,-26.533 cw(c195.211,-26.938) 195.783,-26.938 ; v1(195.783,-39.167) v1@195.783,-26.619 ; 195.783,-27.06 cw(c196.529,-27.06) v1@196.002,-26.533 ; v1(232.265,-52.621) D26.1@234.296,-52.621 ; v1@232.459,-52.814 cw(c232.925,-53.28) 232.925,-52.621 cw(c232.925,-51.962) v1@232.459,-52.428 ; D26.1@233.937,-52.98 ccw(c233.07,-53.847) 233.07,-52.621 ccw(c233.07,-51.395) D26.1@233.937,-52.262
  Bottom Layer w0.254: v1(187.554,-26.34) v1(195.809,-26.34) ; v1@187.747,-26.533 cw(c188.213,-26.999) 188.213,-26.34 cw(c188.213,-25.681) v1@187.747,-26.147 ; v1@195.616,-26.533 ccw(c195.15,-26.999) 195.15,-26.34 ccw(c195.15,-25.681) v1@195.616,-26.147 ; v1@195.783,-39.44 cw(c195.783,-40.099) 196.249,-39.633 cw(c196.715,-39.167) v1@196.056,-39.167 ; v1(195.783,-39.167) 197.434,-40.818 205.25,-40.818 212.235,-47.803 227.447,-47.803 v1(232.265,-52.621) ; v1@231.992,-52.621 ccw(c231.333,-52.621) 231.799,-52.155 ccw(c232.265,-51.689) v1@232.265,-52.348
NetD27_1: D27.1 U28.3 | length 10.1
  Top Layer w0.254: U28.3@231.796,-31.292 233.02,-31.292 233.401,-31.673 233.401,-34.138 234.054,-34.791 D27.1@236.009,-34.791 ; U28.3@232.517,-31.485 cw(c232.983,-31.951) 232.983,-31.292 cw(c232.983,-30.633) U28.3@232.517,-31.099 ; D27.1@235.523,-35.15 ccw(c234.656,-36.018) 234.656,-34.791 ccw(c234.656,-33.565) D27.1@235.523,-34.432
NetD28_1: D28.1 U29.3 | length 16.9
  Top Layer w0.254: U29.3@231.724,4.141 233.376,4.141 234.493,5.258 234.493,15.113 235.008,15.628 ; U29.3@232.517,3.948 cw(c232.983,3.482) 232.983,4.141 cw(c232.983,4.8) U29.3@232.517,4.334 ; D28.1@235.441,15.376 ccw(c235.008,15.129) 235.008,15.628 ; D28.1@235.441,15.879 cw(c235.008,16.126) 235.008,15.628 ; D28.1@236.009,15.628 235.008,15.628
NetD30_1: D30.1 U31.3 | length 85.8
  Top Layer w0.254: U31.3@186.077,-22.149 v1(187.554,-22.149) ; U31.3@186.869,-22.341 cw(c187.332,-22.804) v1@187.332,-22.149 ; U31.3@186.869,-21.955 ccw(c187.337,-21.486) v1@187.337,-22.149 ; v1@187.304,-22.26 ccw(c187.019,-22.387) 187.1,-22.085 ccw(c187.153,-21.886) v1@187.325,-21.999 ; v1@187.305,-22.037 cw(c187.019,-21.909) 187.1,-22.211 cw(c187.153,-22.408) v1@187.324,-22.297 ; v1@187.361,-22.342 ccw(c186.895,-22.808) 186.895,-22.149 ccw(c186.895,-21.49) v1@187.361,-21.956 ; v1@195.834,-22.422 cw(c195.834,-23.081) 196.3,-22.615 cw(c196.766,-22.149) v1@196.107,-22.149 ; v1(195.834,-22.149) 197.053,-23.368 v1(197.053,-39.167) ; v1@196.86,-38.974 ccw(c196.394,-38.508) 197.053,-38.508 ccw(c197.712,-38.508) v1@197.246,-38.974 ; v1(235.948,-52.621) D30.1@237.725,-52.621 ; v1@236.142,-52.814 cw(c236.608,-53.28) 236.608,-52.621 cw(c236.608,-51.962) v1@236.142,-52.428 ; D30.1@237.366,-52.98 ccw(c236.499,-53.847) 236.499,-52.621 ccw(c236.499,-51.395) D30.1@237.366,-52.262
  Bottom Layer w0.254: v1(187.554,-22.149) v1(195.834,-22.149) ; v1@187.747,-22.342 cw(c188.213,-22.808) 188.213,-22.149 cw(c188.213,-21.49) v1@187.747,-21.956 ; v1@195.641,-22.342 ccw(c195.175,-22.808) 195.175,-22.149 ccw(c195.175,-21.49) v1@195.641,-21.956 ; v1@197.053,-39.44 cw(c197.053,-40.099) 197.519,-39.633 cw(c197.985,-39.167) v1@197.326,-39.167 ; v1(197.053,-39.167) 198.196,-40.31 205.461,-40.31 212.446,-47.295 230.622,-47.295 v1(235.948,-52.621) ; v1@235.675,-52.621 ccw(c235.016,-52.621) 235.482,-52.155 ccw(c235.948,-51.689) v1@235.948,-52.348
NetD31_1: D31.1 U33.3 | length 17
  Top Layer w0.254: U33.3@231.724,8.078 233.478,8.078 234.086,8.687 234.086,18.39 234.855,19.158 ; U33.3@232.517,7.885 cw(c232.983,7.419) 232.983,8.078 cw(c232.983,8.737) U33.3@232.517,8.271 ; D31.1@235.478,18.85 ccw(c234.855,18.375) 234.855,19.158 ; D31.1@235.478,19.467 cw(c234.855,19.942) 234.855,19.158 ; D31.1@236.009,19.158 234.855,19.158
NetD32_1: D32.1 U32.3 | length 10.5
  Top Layer w0.254: U32.3@231.796,-27.355 233.019,-27.355 233.274,-27.61 233.274,-30.446 234.164,-31.337 D32.1@236.009,-31.337 ; U32.3@232.517,-27.548 cw(c232.983,-28.014) 232.983,-27.355 cw(c232.983,-26.696) U32.3@232.517,-27.162 ; D32.1@235.523,-31.696 ccw(c234.656,-32.563) 234.656,-31.337 ccw(c234.656,-30.11) D32.1@235.523,-30.978
NetD39_1: D39.1 R97.1 | length 23.7
  Top Layer w0.254: R97.1@229.845,-54.915 v1(231.75,-54.915) ; R97.1@230.458,-55.274 cw(c231.325,-56.141) 231.325,-54.915 cw(c231.325,-53.688) R97.1@230.458,-54.556 ; v1@231.557,-55.108 ccw(c231.091,-55.574) 231.091,-54.915 ccw(c231.091,-54.256) v1@231.557,-54.722 ; D39.1@237.726,-49.715 239.249,-49.715 ; D39.1@238.839,-49.929 cw(c239.249,-50.215) 239.249,-49.715 ; D39.1@238.901,-49.468 ccw(c239.249,-49.345) 239.249,-49.715 ; v1@239.431,-54.722 ccw(c238.965,-54.256) 239.624,-54.256 ccw(c240.283,-54.256) v1@239.817,-54.722 ; v1(239.624,-54.915) 239.624,-50.089 239.249,-49.715
  Bottom Layer w0.254: v1(231.75,-54.915) v1(239.624,-54.915) ; v1@231.943,-55.108 cw(c232.409,-55.574) 232.409,-54.915 cw(c232.409,-54.256) v1@231.943,-54.722 ; v1@239.431,-55.108 ccw(c238.965,-55.574) 238.965,-54.915 ccw(c238.965,-54.256) v1@239.431,-54.722
NetD39_2: D39.2 U40.6 | length 14.7
  Top Layer w0.254: U40.6@225.146,-49.961 227.687,-49.961 228.702,-48.946 233.274,-48.946 234.042,-49.715 D39.2@235.44,-49.715 ; U40.6@225.867,-50.154 cw(c226.333,-50.62) 226.333,-49.961 cw(c226.333,-49.302) U40.6@225.867,-49.768 ; 234.472,-49.715 ccw(c234.472,-48.228) D39.2@235.523,-49.279 ; 234.839,-49.715 cw(c234.839,-50.681) D39.2@235.523,-49.998 ; 235.085,-49.715 ccw(c235.085,-48.841) D39.2@235.702,-49.459
NetD40_1: D40.1 R101.1 | length 5.7
  Top Layer w0.254: D40.1@237.951,-28.154 cw(c237.122,-28.983) 238.295,-28.983 ; v1@238.11,-29.576 ccw(c237.663,-29.129) 238.295,-29.129 ; 238.295,-29.091 ccw(c238.981,-29.091) v1@238.496,-29.576 ; 238.295,-29.059 cw(c239.575,-29.059) D40.1@238.67,-28.154 ; 238.295,-28.446 cw(c238.962,-28.446) D40.1@238.49,-27.974 ; v1(238.303,-29.769) 238.295,-29.761 238.295,-27.54 D40.1@238.303,-27.548
NetD40_2: D40.2 U42.6 | length 26.8
  Top Layer w0.254: v1@223.175,-27.036 ccw(c222.709,-26.57) 223.368,-26.57 ccw(c224.027,-26.57) v1@223.561,-27.036 ; v1(223.368,-27.229) 223.368,-26.289 223.699,-25.958 U42.6@225.074,-25.958 ; U42.6@224.281,-26.151 ccw(c223.815,-26.617) 223.815,-25.958 ccw(c223.815,-25.299) U42.6@224.281,-25.765 ; v1@234.324,-27.465 cw(c234.654,-28.036) 234.825,-27.399 cw(c234.995,-26.763) v1@234.424,-27.092 ; v1@234.381,-27.422 cw(c234.847,-27.888) 234.847,-27.229 cw(c234.847,-26.57) v1@234.381,-27.036 ; 234.593,-27.229 cw(c234.593,-28.424) D40.2@235.669,-27.905 ; 234.997,-27.229 cw(c234.997,-28.229) D40.2@235.898,-27.794 ; D40.2@235.402,-27.229 cw(c235.402,-28.034) D40.2@236.126,-27.684 ; D40.2@235.44,-28.015 ccw(c234.188,-28.619) v1(234.188,-27.229) 235.459,-27.229 D40.2@236.025,-27.794
  Bottom Layer w0.254: v1(223.368,-27.229) v1(234.188,-27.229) ; v1@223.561,-27.422 cw(c224.027,-27.888) 224.027,-27.229 cw(c224.027,-26.57) v1@223.561,-27.036 ; v1@233.995,-27.422 ccw(c233.529,-27.888) 233.529,-27.229 ccw(c233.529,-26.57) v1@233.995,-27.036
NetD41_1: D41.1 R106.2 | length 3.4
  Top Layer w0.762: R106.2@140.19,22.573 D41.1@140.19,25.444 ; 140.19,23.211 ccw(c140.864,23.211) R106.2@140.388,22.735
NetD42_1: D42.1 R105.1 | length 6.6
  Top Layer w0.254: D42.1@237.926,-23.905 ccw(c237.036,-23.014) v1@238.295,-23.014 ; v1@238.062,-22.935 cw(c237.397,-23.345) 238.152,-23.547 ; v1@238.102,-22.985 cw(c237.636,-23.451) 238.295,-23.451 cw(c238.954,-23.451) v1@238.488,-22.985 ; D42.1@238.106,-24.084 ccw(c237.649,-23.627) 238.295,-23.627 ; v1@238.158,-23.028 cw(c237.948,-23.393) 238.355,-23.284 ; 238.216,-23.309 cw(c238.663,-23.429) v1@238.431,-23.028 ; D42.1@238.295,-23.984 v1(238.295,-22.792) ; v1@238.295,-23.061 ccw(c239.488,-23.061) D42.1@238.644,-23.905 ; 238.424,-23.541 cw(c239.133,-23.351) v1@238.522,-22.943
NetD42_2: D42.2 U43.6 | length 23.3
  Top Layer w0.254: v1(223.622,-22.022) U43.6@225.145,-22.022 ; v1@223.813,-22.022 ccw(c223.813,-21.359) U43.6@224.281,-21.828 ; v1@223.815,-22.215 cw(c224.281,-22.681) 224.281,-22.022 cw(c224.281,-21.363) v1@223.815,-21.829 ; v1@223.818,-22.022 cw(c223.818,-22.677) U43.6@224.281,-22.214 ; v1@223.852,-22.168 cw(c224.012,-22.269) 224.06,-22.087 cw(c224.132,-21.821) v1@223.876,-21.922 ; v1@223.851,-21.874 ccw(c224.012,-21.771) 224.061,-21.955 ccw(c224.132,-22.221) v1@223.876,-22.121 ; v1@234.169,-22.664 v1(234.163,-22.657) 235.407,-22.657 236.009,-23.259 ; v1@234.356,-22.85 cw(c234.822,-23.316) 234.822,-22.657 cw(c234.822,-21.998) v1@234.356,-22.464 ; D42.2@235.704,-23.85 ccw(c235.282,-23.259) 236.009,-23.259 ; D42.2@236.009,-23.984 236.009,-23.259 ; D42.2@236.307,-23.859 cw(c236.764,-23.259) 236.009,-23.259
  Bottom Layer w0.254: v1@223.622,-22.295 cw(c223.622,-22.954) 224.088,-22.488 cw(c224.554,-22.022) v1@223.895,-22.022 ; v1(223.622,-22.022) 225.019,-23.419 231.877,-23.419 232.639,-22.657 v1(234.163,-22.657) ; v1@233.97,-22.85 ccw(c233.504,-23.316) 233.504,-22.657 ccw(c233.504,-21.998) v1@233.97,-22.464
NetD43_1: D43.1 R110.1 | length 13.2
  Top Layer w0.254: D43.1@237.951,-20.476 ccw(c237.122,-19.646) 238.295,-19.646 ; v1@238.102,-18.362 cw(c237.636,-18.828) 238.295,-18.828 cw(c238.954,-18.828) v1@238.488,-18.362 ; D43.1@238.295,-20.936 v1(238.295,-18.169) v1@238.303,-18.161 ; 238.295,-20.184 ccw(c238.962,-20.184) D43.1@238.49,-20.655 ; 238.295,-19.57 ccw(c239.575,-19.57) D43.1@238.67,-20.476
  Bottom Layer w0.254: R110.1@237.918,-17.098 cw(c237.009,-18.007) v1@238.295,-18.007 ; v1@238.06,-18.03 ccw(c237.391,-17.635) 238.141,-17.434 ; R110.1@238.098,-16.918 cw(c237.622,-17.394) 238.295,-17.394 ; v1@238.102,-17.976 ccw(c237.636,-17.51) 238.295,-17.51 ccw(c238.954,-17.51) v1@238.488,-17.976 ; v1@238.158,-17.932 ccw(c237.938,-17.55) 238.364,-17.664 ; 238.191,-17.619 ccw(c238.69,-17.485) v1@238.431,-17.932 ; R110.1@238.277,-16.739 238.295,-16.756 v1(238.295,-18.169) ; v1@238.295,-17.923 cw(c239.462,-17.923) R110.1@238.637,-17.098 ; 238.423,-17.446 ccw(c239.089,-17.624) v1@238.52,-18.014
NetD43_2: D43.2 U45.6 | length 26.7
  Top Layer w0.254: v1(223.622,-18.085) 225.145,-18.085 U45.6@225.146,-18.084 ; v1@223.813,-18.085 ccw(c223.813,-17.422) U45.6@224.281,-17.891 ; v1@223.815,-18.278 cw(c224.281,-18.744) 224.281,-18.085 cw(c224.281,-17.426) v1@223.815,-17.892 ; v1@223.818,-18.085 cw(c223.818,-18.74) U45.6@224.281,-18.277 ; v1@223.852,-18.231 cw(c224.012,-18.332) 224.06,-18.15 cw(c224.132,-17.884) v1@223.876,-17.985 ; v1@223.851,-17.937 ccw(c224.012,-17.834) 224.061,-18.018 ccw(c224.132,-18.284) v1@223.876,-18.184 ; v1@233.976,-17.269 cw(c233.51,-17.735) 234.169,-17.735 cw(c234.828,-17.735) v1@234.362,-17.269 ; v1(234.169,-17.076) 234.169,-20.595 234.51,-20.936 ; 234.917,-20.936 cw(c234.917,-21.816) D43.2@235.538,-21.194 ; 235.088,-20.936 ccw(c235.088,-20.092) D43.2@235.711,-20.663 ; D43.2@235.523,-20.491 cw(c234.51,-19.561) 234.51,-20.936 ; D43.2@236.009,-20.936 234.51,-20.936
  Bottom Layer w0.254: v1(223.622,-18.085) 224.638,-17.069 234.163,-17.069 v1(234.169,-17.076) ; v1@223.622,-17.812 ccw(c223.622,-17.153) 224.088,-17.619 ccw(c224.554,-18.085) v1@223.895,-18.085 ; 233.494,-17.069 cw(c233.494,-17.751) v1@233.976,-17.269 ; 233.527,-17.069 ccw(c233.527,-16.433) v1@233.976,-16.883
NetD49_1: D49.1 R114.1
  other v1: 227.508,25.298
NetD49_2: D49.2 U46.6 | length 9.4
  Top Layer w0.254: D49.2@227.181,22.153 cw(c226.314,21.286) 227.54,21.286 cw(c228.766,21.286) D49.2@227.899,22.153 ; D49.2@227.54,22.639 227.54,20.872 228.626,19.786 U46.6@231.724,19.786 ; U46.6@230.931,19.593 ccw(c230.465,19.127) 230.465,19.786 ccw(c230.465,20.445) U46.6@230.931,19.979
NetD51_1: D51.1 R120.1
  other v1: 231.013,25.273
NetD51_2: D51.2 U49.6 | length 12.6
  Top Layer w0.254: D51.2@230.718,22.103 cw(c230.279,21.507) 231.02,21.507 ; D51.2@231.02,22.639 231.02,21.507 ; D51.2@231.321,22.103 ccw(c231.76,21.507) 231.02,21.507 ; U49.6@231.724,15.899 232.714,15.899 233.274,16.459 ; U49.6@232.327,15.918 ccw(c232.439,16.595) 232.924,16.11 ; U49.6@232.369,16.169 ccw(c232.539,17.194) 233.274,16.459 ; 231.02,21.507 231.521,21.006 232.766,21.006 233.274,20.498 233.274,16.459
NetD54_1: D54.1 R126.1
  other v1: 234.671,25.298
NetD54_2: D54.2 U50.6 | length 15.1
  Top Layer w0.254: U50.6@231.724,12.013 233.044,12.013 233.68,12.649 233.68,20.523 234.627,21.47 ; U50.6@232.517,11.82 cw(c232.983,11.354) 232.983,12.013 cw(c232.983,12.672) U50.6@232.517,12.206 ; D54.2@234.314,22.112 cw(c233.811,21.47) 234.627,21.47 ; D54.2@234.627,22.639 234.627,21.47 ; D54.2@234.94,22.112 ccw(c235.442,21.47) 234.627,21.47
NetD57_1: D57.1 R131.1
  other v1: 191.338,10.566
NetD57_2: D57.2 U53.6 | length 7.4
  Top Layer w0.254: U53.6@185.811,8.574 ccw(c185.345,9.04) 186.004,9.04 ccw(c186.663,9.04) U53.6@186.197,8.574 ; U53.6@186.004,8.381 186.004,9.906 186.683,10.585 D57.2@188.679,10.585 ; D57.2@188.193,10.226 ccw(c187.326,9.359) 187.326,10.585 ccw(c187.326,11.811) D57.2@188.193,10.944
NetD58_1: D58.1 R138.1
  other v1: 191.338,-0.533
NetD58_2: D58.2 U54.6 | length 12.6
  Top Layer w0.254: U54.6@186.541,0.177 cw(c186.541,-2.283) D58.2@188.387,-0.657 ; U54.6@186.772,-0.016 cw(c187.238,-0.482) 187.238,0.177 cw(c187.238,0.836) U54.6@186.772,0.37 ; 187.103,0.177 cw(c187.103,-1.788) D58.2@188.577,-0.489 ; 187.665,0.177 cw(c187.665,-1.293) D58.2@188.768,-0.322 ; D58.2@188.117,-0.274 ccw(c187.757,-0.105) 188.038,0.177 ; D58.2@188.196,-0.825 ccw(c185.979,-2.778) U54.6@185.979,0.177 188.038,0.177 ; D58.2@188.513,0.015 cw(c188.441,0.579) 188.038,0.177 ; D58.2@188.704,-0.489 188.038,0.177
NetD59_1: D59.1 R142.1
  other v1: 191.364,5.08
NetD59_2: D59.2 U56.6 | length 5.5
  Top Layer w0.254: U56.6@185.979,4.266 187.897,4.266 ; U56.6@186.772,4.073 cw(c187.238,3.607) 187.238,4.266 cw(c187.238,4.925) U56.6@186.772,4.459 ; 187.902,4.27 cw(c188.552,3.62) D59.2@188.552,4.54 ; D59.2@188.064,4.908 cw(c187.435,4.728) 187.897,4.266 ; D59.2@188.679,5.048 187.897,4.266
NetR42_1: R42.1 U13.1 | length 5.9
  Top Layer w0.254: U13.1@150.946,-12.548 R42.1@153.873,-12.548 ; U13.1@151.715,-12.765 cw(c152.24,-13.29) 152.24,-12.548 ; U13.1@151.715,-12.379 ccw(c152.122,-11.972) 152.122,-12.548 ; R42.1@153.387,-12.907 ccw(c152.52,-13.774) 152.52,-12.548 ccw(c152.52,-11.321) R42.1@153.387,-12.188
NetR44_1: R44.1 U14.1 | length 5.9
  Top Layer w0.254: U14.1@150.923,-8.509 R44.1@153.873,-8.509 ; U14.1@151.715,-8.701 cw(c152.179,-9.165) 152.179,-8.509 ; U14.1@151.715,-8.315 ccw(c152.184,-7.846) 152.184,-8.509 ; R44.1@153.387,-8.868 ccw(c152.52,-9.735) 152.52,-8.509 ccw(c152.52,-7.283) R44.1@153.387,-8.15
NetR46_1: R46.1 U15.1 | length 3.2
  Top Layer w0.254: v1(230.506,-14.147) v1(230.506,-14.147) ; v1@230.699,-14.34 cw(c231.165,-14.806) 231.165,-14.147 cw(c231.165,-13.488) v1@230.699,-13.954 ; U15.1@230.922,-14.331 ccw(c230.506,-14.71) v1(230.506,-14.147) ; U15.1@230.922,-13.963 cw(c230.506,-13.583) v1(230.506,-14.147) ; U15.1@231.724,-14.147 v1(230.506,-14.147) ; U15.1@231.796,-14.147 U15.1@231.797,-14.148
NetR47_1: R47.1 U16.1 | length 6.1
  Top Layer w0.254: U16.1@230.801,-46.09 cw(c231.267,-46.556) 231.267,-45.897 cw(c231.267,-45.238) U16.1@230.801,-45.704 ; U16.1@230.899,-46.051 ccw(c230.608,-46.249) v1(230.608,-45.897) ; U16.1@230.899,-45.743 cw(c230.608,-45.545) v1(230.608,-45.897) ; U16.1@231.796,-45.897 v1(230.608,-45.897)
  Bottom Layer w0.254: R47.1@229.591,-45.898 R47.1@229.591,-45.898 v1(230.608,-45.897) ; R47.1@230.155,-45.639 ccw(c230.608,-45.37) v1(230.608,-45.897) ; R47.1@230.155,-46.155 cw(c230.608,-46.421) v1(230.608,-45.897) ; v1@230.415,-46.09 ccw(c229.949,-46.556) 229.949,-45.897 ccw(c229.949,-45.238) v1@230.415,-45.704
NetR48_1: R48.1 U17.1 | length 6.1
  Top Layer w0.254: U17.1@186.076,-37.134 186.077,-37.135 R48.1@189.205,-37.135 ; U17.1@186.869,-37.327 cw(c187.332,-37.79) 187.332,-37.135 ; U17.1@186.869,-36.941 ccw(c187.337,-36.472) 187.337,-37.135 ; R48.1@188.109,-37.494 ccw(c187.242,-38.361) 187.242,-37.135 ccw(c187.242,-35.908) R48.1@188.109,-36.776
NetR52_1: R52.1 U18.1 | length 3.2
  Top Layer w0.254: v1@230.699,-10.403 cw(c231.165,-10.869) 231.165,-10.21 cw(c231.165,-9.551) v1@230.699,-10.017 ; U18.1@230.922,-10.394 ccw(c230.506,-10.773) v1(230.506,-10.21) ; U18.1@230.922,-10.026 cw(c230.506,-9.646) v1(230.506,-10.21) ; U18.1@231.724,-10.21 v1(230.506,-10.21)
NetR53_1: R53.1 U19.1 | length 5.9
  Top Layer w0.254: U19.1@150.972,-4.445 R53.1@153.873,-4.445 ; U19.1@151.715,-4.688 cw(c152.301,-5.274) 152.301,-4.445 ; U19.1@151.715,-4.302 ccw(c152.061,-3.956) 152.061,-4.445 ; R53.1@153.387,-4.804 ccw(c152.52,-5.671) 152.52,-4.445 ccw(c152.52,-3.219) R53.1@153.387,-4.086
NetR55_1: R55.1 U20.1 | length 6
  Top Layer w0.254: U20.1@230.801,-42.026 cw(c231.267,-42.492) 231.267,-41.833 cw(c231.267,-41.174) U20.1@230.801,-41.64 ; U20.1@230.899,-41.987 ccw(c230.608,-42.185) v1(230.608,-41.833) ; U20.1@230.899,-41.679 cw(c230.608,-41.481) v1(230.608,-41.833) ; U20.1@231.796,-41.833 v1(230.608,-41.833)
  Bottom Layer w0.254: R55.1@229.591,-41.834 v1(230.608,-41.833) ; R55.1@230.155,-41.575 ccw(c230.608,-41.306) v1(230.608,-41.833) ; R55.1@230.155,-42.091 cw(c230.608,-42.357) v1(230.608,-41.833) ; v1@230.415,-42.026 ccw(c229.949,-42.492) 229.949,-41.833 ccw(c229.949,-41.174) v1@230.415,-41.64